# EAGLE board BBB-SPI-FF-Cape-0902 (EAGLE 7.6.0)
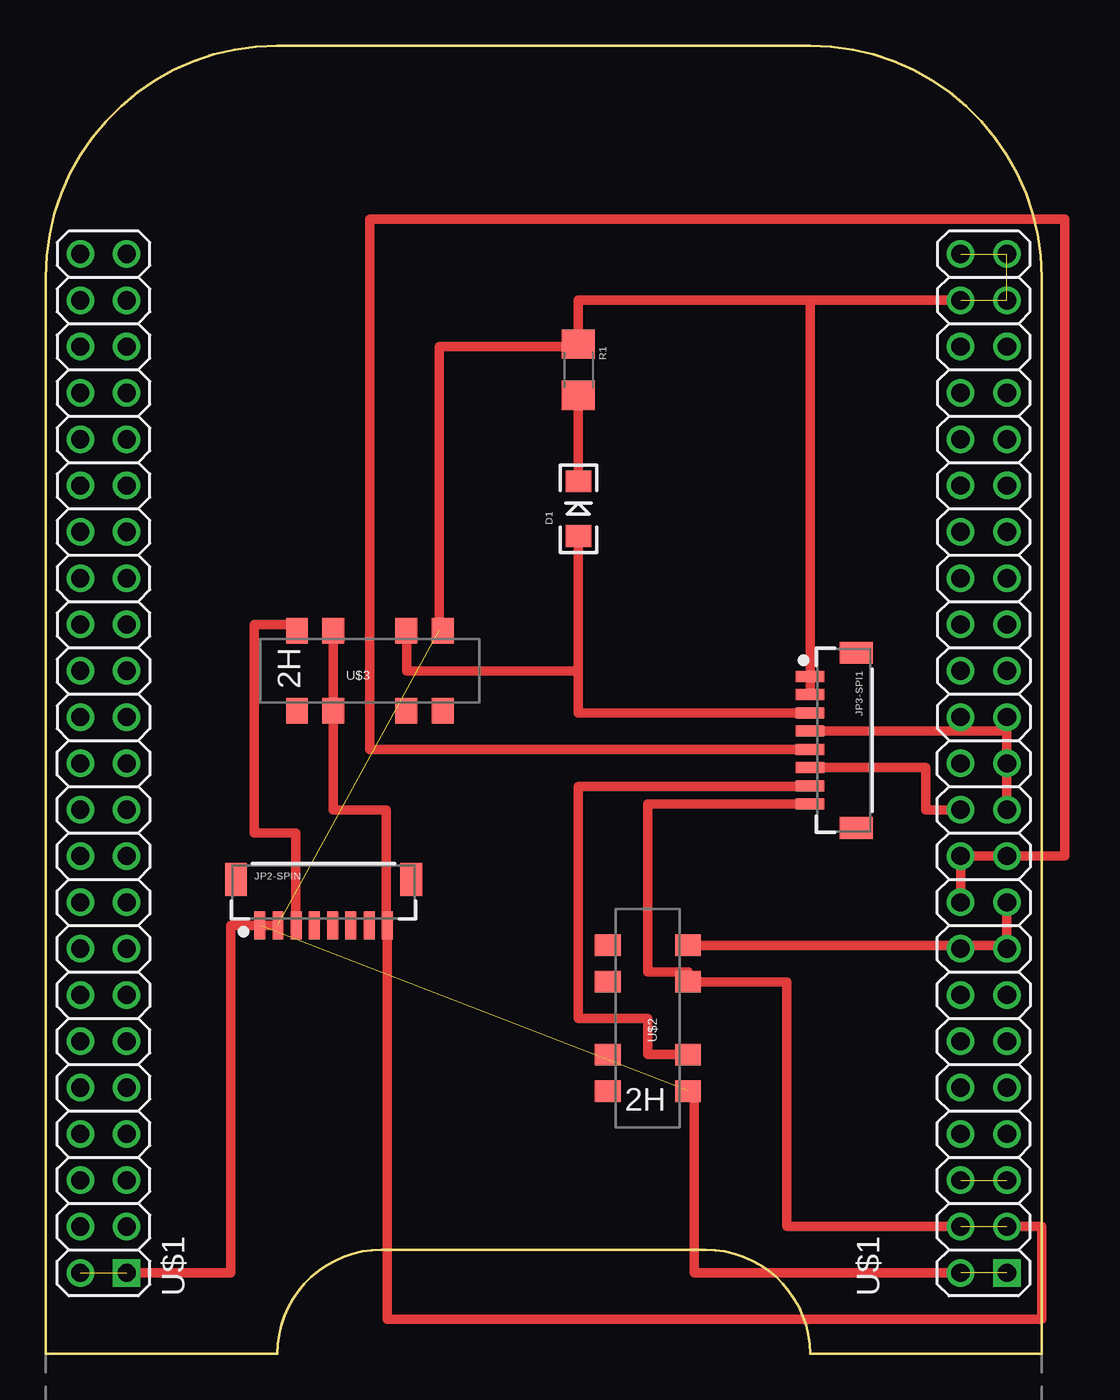
[diagram p0: board, top side]

Size 54.61 x 71.75 mm. Coordinates in mm from the lower left corner, seen from the top.
Copper layers (1*16): Top 0.035mm / dielectric 1.5mm / Bottom 0.035mm
Design rules "default": minimum track width 10mil, minimum drill 24mil, track to track 8mil, track to pad 8mil, pad to pad 8mil, via to via 8mil, smd to smd 8mil, copper to edge 40mil, drill to drill 8mil, minimum pad ring 10mil, minimum via ring 8mil, stop-mask expansion 4mil, vias tented up to drill 0mil, thermal gap 10mil
Net classes: 0 default: width 0.254 mm

## Footprints (pad centres in the part's own frame; a part is rotated, then mirrored left to right if it is on the bottom)
LED-1206 = smd 1.2 x 1.4: A -1.5,0; C 1.5,0
BM08B-SRSS-TB = smd 0.6 x 1.55: 1 -3.5,0; 2 -2.5,0; 3 -1.5,0; 4 -0.5,0; 5 0.5,0; 6 1.5,0; 7 2.5,0; 8 3.5,0 | smd 1.2 x 1.8: P$9 4.8,2.525; P$10 -4.8,2.525
1206 = smd 1.6 x 1.8: 1 -1.4,0; 2 1.4,0
BEAGLEBONE_SHIELD = drill 1 square: 1 4.445,19.05; 47 52.705,19.05 | drill 1: 2 1.905,19.05; 3 4.445,21.59; 4 1.905,21.59; 5 4.445,24.13; 6 1.905,24.13; 7 4.445,26.67; 8 1.905,26.67; 9 4.445,29.21; 10 1.905,29.21; 11 4.445,31.75; 12 1.905,31.75; 13 4.445,34.29; 14 1.905,34.29; 15 4.445,36.83; 16 1.905,36.83; 17 4.445,39.37; 18 1.905,39.37; 19 4.445,41.91; 20 1.905,41.91; 21 4.445,44.45; 22 1.905,44.45; 23 4.445,46.99; 24 1.905,46.99; 25 4.445,49.53; 26 1.905,49.53; 27 4.445,52.07; 28 1.905,52.07; 29 4.445,54.61; 30 1.905,54.61; 31 4.445,57.15; 32 1.905,57.15; 33 4.445,59.69; 34 1.905,59.69; 35 4.445,62.23; 36 1.905,62.23; 37 4.445,64.77; 38 1.905,64.77; 39 4.445,67.31; 40 1.905,67.31; 41 4.445,69.85; 42 1.905,69.85; 43 4.445,72.39; 44 1.905,72.39; 45 4.445,74.93; 46 1.905,74.93; 48 50.165,19.05; 49 52.705,21.59; 50 50.165,21.59; 51 52.705,24.13; 52 50.165,24.13; 53 52.705,26.67; 54 50.165,26.67; 55 52.705,29.21; 56 50.165,29.21; 57 52.705,31.75; 58 50.165,31.75; 59 52.705,34.29; 60 50.165,34.29; 61 52.705,36.83; 62 50.165,36.83; 63 52.705,39.37; 64 50.165,39.37; 65 52.705,41.91; 66 50.165,41.91; 67 52.705,44.45; 68 50.165,44.45; 69 52.705,46.99; 70 50.165,46.99; 71 52.705,49.53; 72 50.165,49.53; 73 52.705,52.07; 74 50.165,52.07; 75 52.705,54.61; 76 50.165,54.61; 77 52.705,57.15; 78 50.165,57.15; 79 52.705,59.69; 80 50.165,59.69; 81 52.705,62.23; 82 50.165,62.23; 83 52.705,64.77; 84 50.165,64.77; 85 52.705,67.31; 86 50.165,67.31; 87 52.705,69.85; 88 50.165,69.85; 89 52.705,72.39; 90 50.165,72.39; 91 52.705,74.93; 92 50.165,74.93
CL-SB-23B = smd 1.2 x 1.4: 1 -4,-2.2; 2 -2,-2.2; 3 2,-2.2; 4 4,-2.2; 5 -4,2.2; 6 -2,2.2; 7 2,2.2; 8 4,2.2

## Placement (x,y rotation side)
D1  BLUE  [LED-1206]  29.21,46.36 90 top
JP2-SPIN  [BM08B-SRSS-TB]  15.24,23.5 0 top
JP3-SPI1  [BM08B-SRSS-TB]  41.91,33.66 270 top
R1  1K  [1206]  29.21,53.98 270 top
U$1  BEAGLEBONE_OUTLINE  [BEAGLEBONE_SHIELD]  0,-14.61 0 top
U$2  CL-SB-23B-01TSMD  [CL-SB-23B]  33.02,18.41 270 top
U$3  CL-SB-23B-01TSMD  [CL-SB-23B]  17.78,37.47 180 top

## Library data of the parts
D1 = SparkFun-LED; PROD_ID: DIO-09911
JP2-SPIN JP3-SPI1 = SparkFun-Connectors
R1 = SparkFun-Resistors
U$1 = adafruit; OC_NEWARK: unknown
U$2 U$3 = MADCAT-BBB-Cape; OC_NEWARK: unknown

## Nets
AIN0: U$1.85
AIN1: U$1.86
AIN2: U$1.83
AIN4: U$1.79
AIN6: U$1.81
CS: U$1.63 U$2.5
D: D1.A JP3-SPI1.3 U$3.2
FF-CLK: JP3-SPI1.7 U$2.7
GND: JP2-SPIN.1 JP2-SPIN.2 JP3-SPI1.2 R1.1 U$1.1 U$1.2 U$1.47 U$1.48 U$1.89 U$1.90 U$1.91 U$1.92 U$2.8 U$3.1
N$1: D1.C R1.2
Q: JP2-SPIN.3 U$3.4
RX-B: U$1.70
SCL: JP3-SPI1.6 U$1.68
SDA: JP3-SPI1.5 U$1.64
SDO: JP3-SPI1.4 U$1.67
SYS_5V: U$1.53
TX-B: U$1.72
VCC: JP2-SPIN.8 JP3-SPI1.8 U$1.49 U$1.50 U$2.6 U$3.3
VDD_5V: U$1.51 U$1.52

## Tracks (layer width: path | path; a pad name or v marks a point on that pad's centre or on a via)
CS
  Top 0.508: U$2.5 52.7,22.41 U$1.63
D
  Top 0.508: JP3-SPI1.3 29.21,35.16 29.21,37.47 | 29.21,37.47 D1.A | U$3.2 19.81,39.66 19.81,37.47 29.21,37.47
FF-CLK
  Top 0.508: U$2.7 33.02,16.41 33.02,18.41 29.21,18.41 29.21,31.11 41.91,31.11 JP3-SPI1.7
GND  (7 unrouted)
  Top 0.508: U$2.8 35.56,14.41 35.56,4.45 U$1.48 | U$3.1 21.59,39.66 21.59,55.25 29.21,55.25 R1.1 29.21,57.78 41.91,57.78 | U$1.90 41.91,57.78 | JP3-SPI1.2 41.91,57.78 | JP2-SPIN.2 JP2-SPIN.1 10.16,23.5 10.16,4.45 U$1.1
N$1
  Top 0.508: D1.C R1.2
Q
  Top 0.508: JP2-SPIN.3 13.72,23.5 13.72,28.57 11.43,28.57 11.43,40 13.78,40 U$3.4
SCL
  Top 0.508: JP3-SPI1.6 48.26,32.16 48.26,29.84 U$1.68
SDA
  Top 0.508: JP3-SPI1.5 17.78,33.16 17.78,62.23 55.88,62.23 55.88,27.3 50.16,27.3 U$1.64
SDO
  Top 0.508: JP3-SPI1.4 52.7,34.16 U$1.67
VCC  (1 unrouted)
  Top 0.508: JP3-SPI1.8 33.02,30.15 33.02,20.96 35.22,20.96 U$2.6 40.64,20.41 40.64,6.98 U$1.50 | U$1.49 54.61,6.98 54.61,1.9 18.74,1.9 JP2-SPIN.8 18.67,23.5 18.67,29.84 15.78,29.84 U$3.3
VDD_5V  (1 unrouted)